# Altium PCB PCB1.PcbDoc
Units mm, origin at the board's own origin, x right, y up, seen from the top; angles counter-clockwise.
Board outline 37.33 x 58.67 mm, 2 copper layers (Top Layer, Bottom Layer); 14 components, 10 nets, 41 pads, 2 vias.
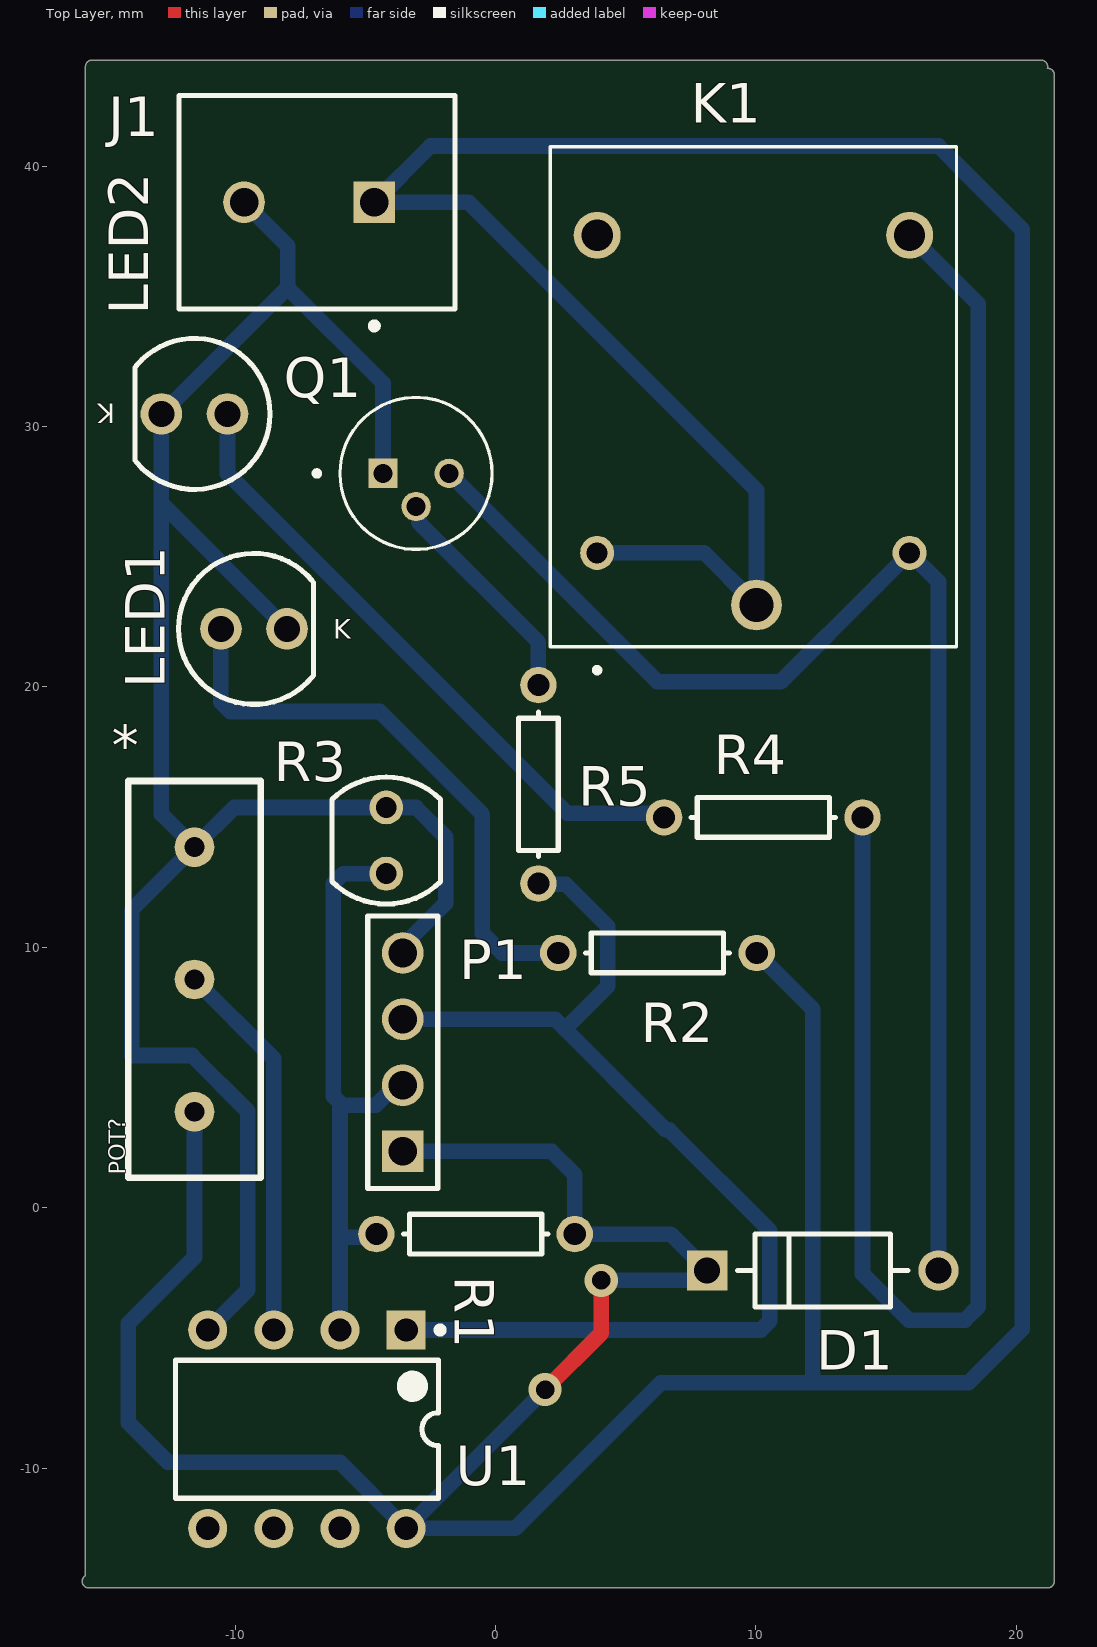
[diagram p0: Top Layer view]
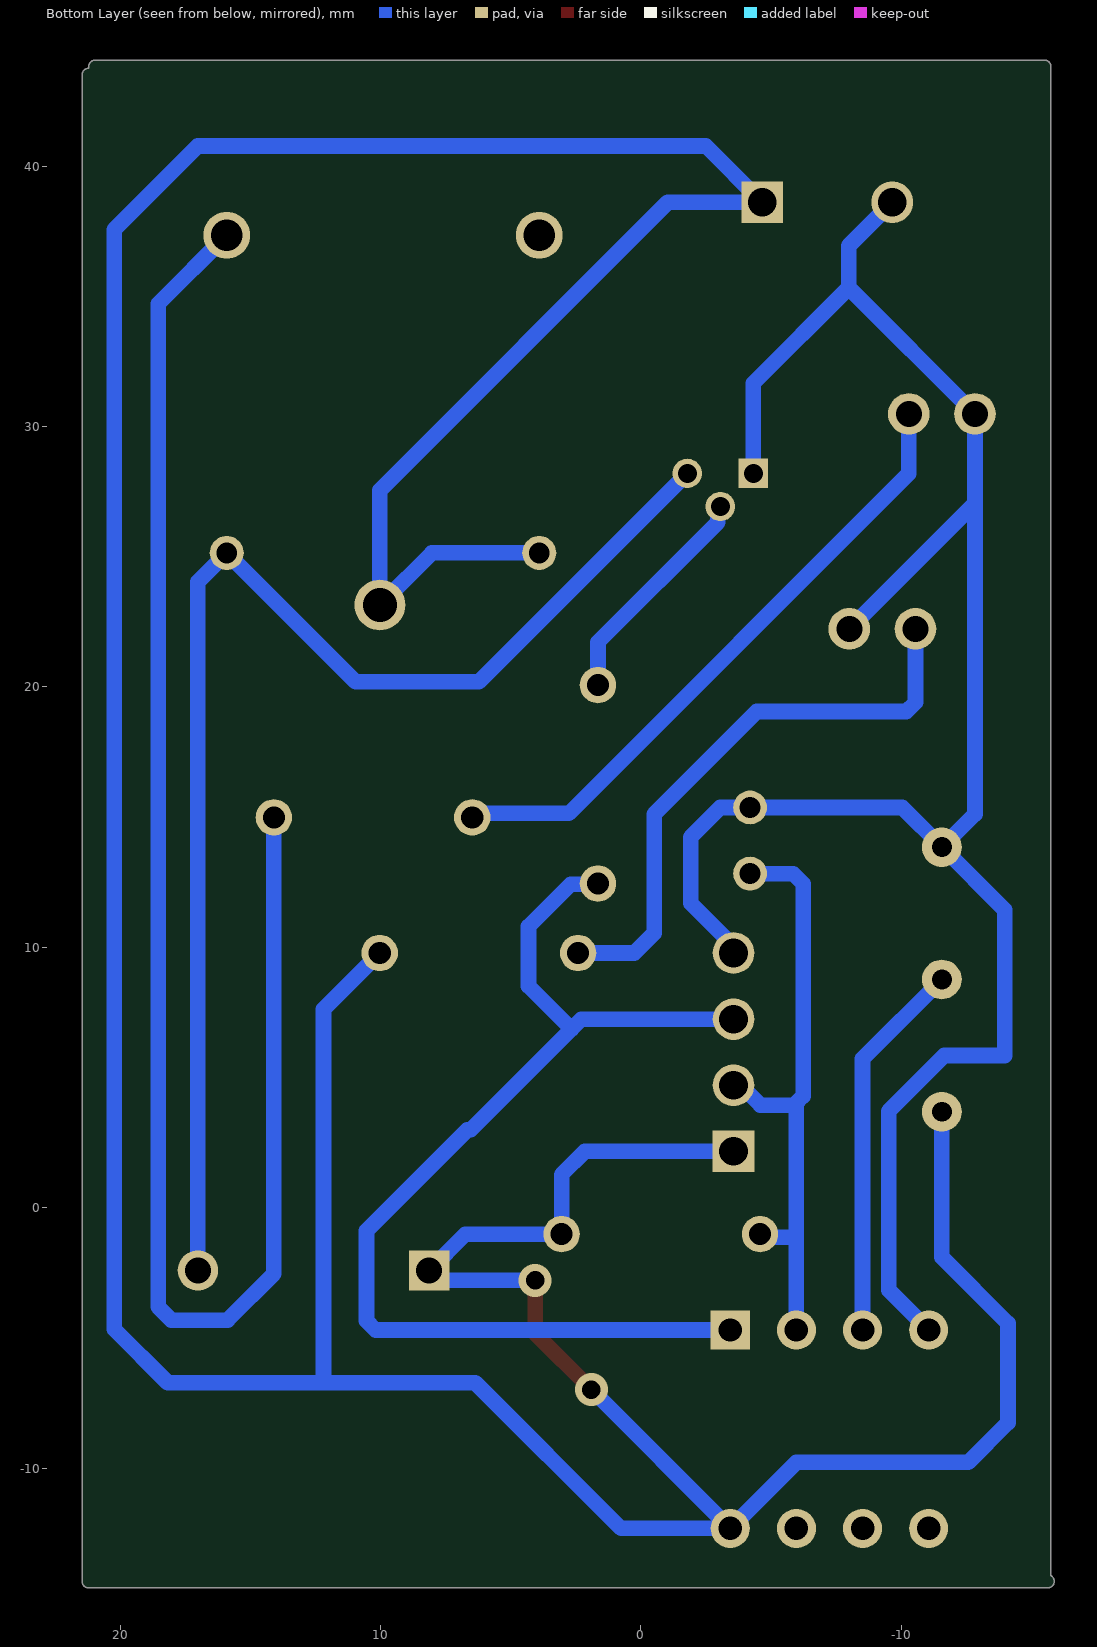
[diagram p1: Bottom Layer view, seen from below]
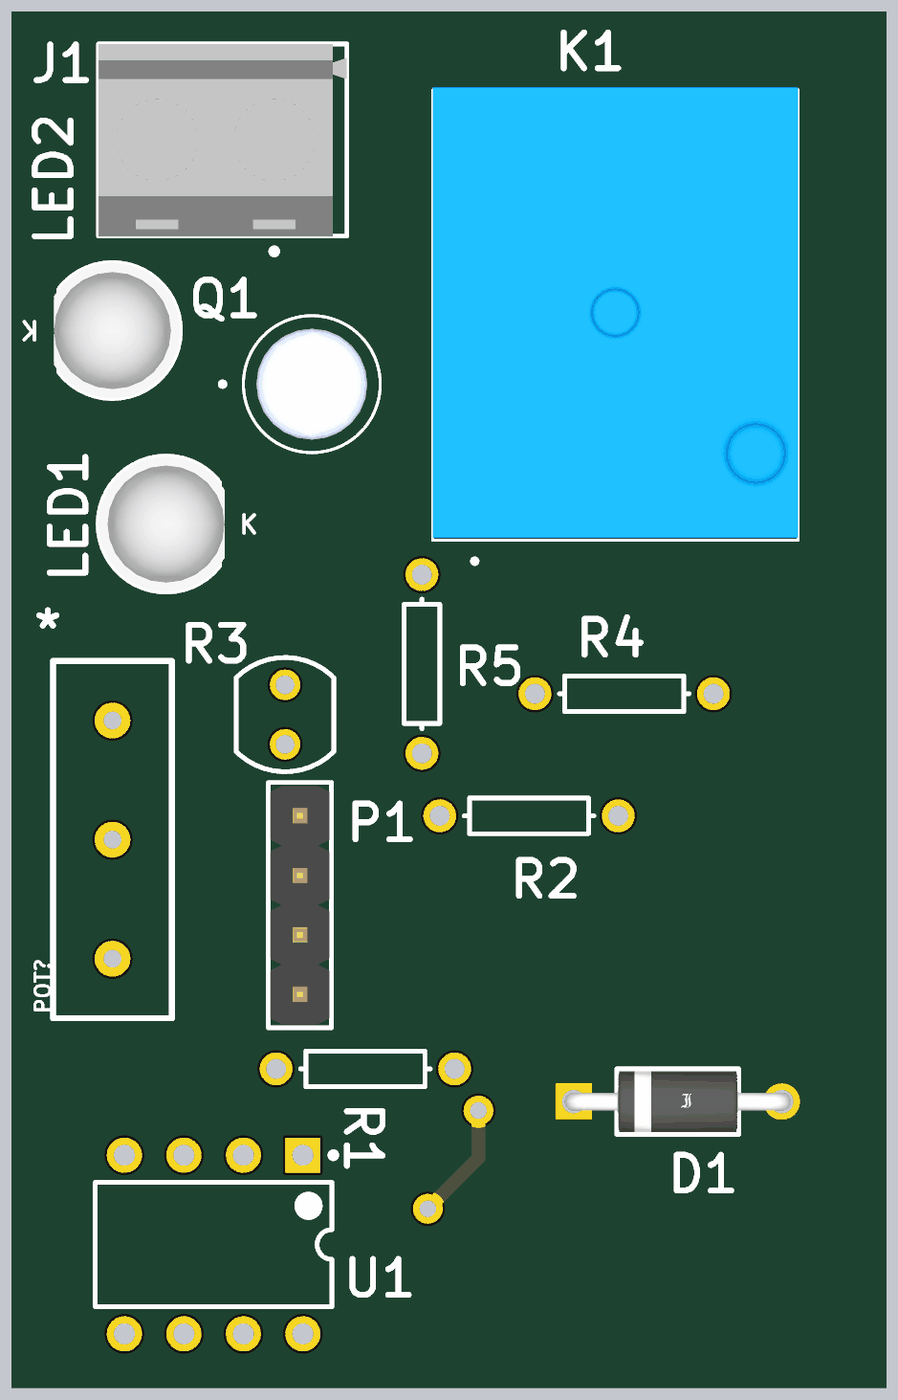
[diagram p2: 3D render of the assembled board from above, using the file's embedded part models]

## Layer stack, top to bottom
Top Solder: solder mask 0.0102, Solder Resist, Dk 3.5
Top Layer: signal copper 0.0356
Dielectric 1: dielectric 0.32, FR-4, Dk 4.8
Bottom Layer: signal copper 0.0356
Bottom Solder: solder mask 0.0102, Solder Resist, Dk 3.5

## Board outline
-15.621,-14.601 cw(c-15.621,-14.351) -15.742,-14.132 cw(c-15.494,-14.097) -15.744,-14.097 -15.744,43.815 cw(c-15.494,43.815) -15.494,44.065 20.955,44.065 cw(c20.955,43.815) 21.205,43.815 cw(c20.955,43.815) 21.198,43.753 cw(c21.209,43.503) 21.459,43.503 21.459,-14.351 cw(c21.209,-14.351) 21.209,-14.601

## Design rules (kind name [scope] priority, off if disabled: settings)
Clearance [All] p1: gap=0.4 ignorepadtopadclearanceinfootprint=FALSE
PolygonConnect [All] p1: connectstyle=Relief reliefconductorwidth=0.254 reliefentries=4 polygonreliefangle="90 Angle" airgapwidth=0.254
RoutingVias [All] p1: holewidth=0.711 width=1.27 viastyle="Through Hole" minholewidth=0.711 minwidth=1.27 maxholewidth=0.711 maxwidth=1.27
SolderMaskExpansion [All] p1: expansion=0.102 istentingtop=FALSE
Width [All] p1: maxlimit=1 minlimit=0.3 preferedwidth=0.6 minimp=50.000000 maximp=50.000000 favimp=50.000000
30 further rules are at their usual default settings.

## Components (designator, comment, footprint, x,y, rotation, side; value= is the part's Value field where it differs from the comment)
* "Component_1" PCBComponent_1 -11.557,3.683 r90 top
D1 "1N4007" FP-1N4007-MFG 12.573,-2.413 r0 top value=15pF
J1 "282836-2" TECO-282836-2_V -7.152,38.608 r180 top
K1 "SRD-12VDC-SL-C" RELAY_SRD-12VDC-SL-C 9.906,31.242 r90 top
LED1 "151051VS04000" "Type 5mm" -9.271,22.225 r0 top
LED2 "151051VS04000" "Type 5mm" -11.557,30.48 r180 top
P1 "61300411121" 61300411121 -3.556,5.969 r90 top
Q1 "2N2222A" TO127P584H533-3 -3.048,28.194 r0 top
R1 "Res1" AXIAL-0.3 -0.762,-1.016 r0 top value=10K
R2 "Res1" AXIAL-0.3 6.223,9.779 r0 top value=1K
R3 "VT90N1" EXCE-VT90N1 -4.191,14.097 r90 top
R4 "Res1" AXIAL-0.3 10.287,14.986 r0 top value=1K
R5 "Res1" AXIAL-0.3 1.651,16.256 r90 top value=3K
U1 "LM358N" ONSC-PDIP-8-626-05_M -7.239,-8.509 r270 top

## Footprints (in the part's own frame and the unit in brackets; to place one, negate y for a bottom-side part, rotate by r counter-clockwise, add the part's x,y. Pads: shape width x height; smd on the part's side, far side on the other; paste and mask are expansions set on the pad)
61300411121 [mm] "Pin Header, pitch 2.54 mm, THT, Vertical, single row, 4p"
  rect 1.6x1.6 hole 1.1: 1(-3.81,0)
  round 1.6 hole 1.1: 2(-1.27,0) 3(1.27,0) 4(3.81,0)
  silkscreen extent -5.23,-1.35 5.23,1.35, body extent -5.08,-1.27 5.08,1.27, height 8.57
AXIAL-0.3 [mm] "Axial Device, Thru-Hole; 2 Leads; 0.3 in Pin Spacing"
  round 1.4 hole 0.85: 1(-3.81,0) 2(3.81,0)
  silkscreen extent -2.77,-0.76 2.77,0.76
EXCE-VT90N1 [mm] "THD, 2-Leads, Body Width 4.17mm (Max), Height 2.29mm"
  round 1.3 hole 0.8: 1(-1.27,0) 2(1.27,0)
  silkscreen extent -2.44,-2.08 2.44,2.08, body extent -2.44,-2.09 2.44,2.09, height 2.29
FP-1N4007-MFG [mm]
  rect 1.55x1.55 hole 1 paste-1000 mask+0: 1(-4.44,0)
  round 1.55 hole 1 paste-1000 mask+0: 2(4.44,0)
  silkscreen extent -3.26,-1.4 3.26,1.4, body extent -5.32,-1.5 5.32,1.5, height 0.25
ONSC-PDIP-8-626-05_M [mm] "DIP, 8-Leads, Body 10x7.1mm, Pitch 2.54mm"
  rect 1.5x1.5 hole 0.9: 1(-3.81,3.81)
  round 1.5 hole 0.9: 2(-3.81,1.27) 3(-3.81,-1.27) 4(-3.81,-3.81) 5(3.81,-3.81) 6(3.81,-1.27) 7(3.81,1.27) 8(3.81,3.81)
  silkscreen extent -3.93,-5.05 2.65,5.24, body extent -3.95,-5 3.95,5, height 5.33
PCBComponent_1 [mil]
  round 60 hole 30: 1(0,0) 2(200,0) 3(400,0)
  silkscreen extent -100,-100 500,100
RELAY_SRD-12VDC-SL-C [mm]
  round 1.308 hole 0.8: COIL1(-6.1,6) COIL2(-6.1,-6)
  round 1.95 hole 1.3: COM(-8.1,-0.12)
  round 1.8 hole 1.2: NC(6.1,6) NO(6.1,-6)
  silkscreen extent -10.7,-7.8 9.5,7.8, body extent -9.6,-7.8 9.6,7.8, height 15.8
TECO-282836-2_V [mm] "Female Header, Pitch 5mm, 1 x 2 Position, Height 10mm"
  rect 1.6x1.6 hole 1.1: 1(-2.5,0)
  round 1.6 hole 1.1: 2(2.5,0)
  silkscreen extent -5.6,-4.1 5,4.87, body extent -5.6,-4.1 5,4.1, height 10
TO127P584H533-3 [mm]
  rect 1.13x1.13 hole 0.73: 1(-1.27,0)
  round 1.13 hole 0.73: 2(0,-1.27) 3(1.27,0)
  silkscreen extent -3.91,-2.92 2.92,2.92, body extent -2.79,-2.79 3.02,3.02, height 2.85
"Type 5mm" [mm] "THT, LED-5mm, 2pin- Body 5.8mm"
  round 1.6 hole 1: 1(1.27,0) 2(-1.27,0)
  silkscreen extent -2.9,-2.9 2.29,2.9, body extent -2.9,-2.9 2.5,2.9, height 11.7

## Part data
D1: library part CMP-123542-000001-1, "Rectifier diode 1000 V 1 A DO-41, ,", Capacitance=15pF, Forward Current=1A, Manufacturer=Diotec, Max Junction Temp=+175°C, Max Repetitive Reverse Voltage=1000V, Max Surge Forward Current=27A, Peak Reverse Current=5uA, Temperature="-50°C to +175°C", Temperature Range Low=-50°C, Automotive=No, Category=Diode, ComponentLink2Description=Datasheet, ComponentLink2URL=https://datasheet.octopart.com/1N4007-Diotec-datasheet-62346875.pdf, Device Class L1="Discrete Semiconductors", Device Class L2=Diodes, Device Class L3="Rectifier Diodes", Height=2.8mm, Ipc Land Pattern Name=DIOAD888W100L520D280, Lead Free=Yes, Manufacturer Part Number=1N4007, Octopart=https://octopart.com/1n4007-diotec-4040411, Package=1N4007, Reverse Voltage=1000V, RoHS=TRUE, Temperature Range High=+175°C
J1: library part CMP-1684-00017-1, "Female Header, Pitch 5 mm, 1 x 2 Position, Height 10 mm, Tail Length 3.5 mm, Rohs, Bulk", Color=Green, Current=13.5A, Manufacturer="TE Connectivity", Package Description="Female Header, Pitch 5 mm, 1 x 2 Position, Height 10 mm, Tail Length 3.5 mm", Package Reference=THD, Standard Package=300, Voltage=300V, 3D Model=282836-2.pdf, Category=Connectors,Interconnects, Clamp Material - Plating=Brass-NickelPlated, Contact Material - Plating=Brass-TinPlated, Datasheet URL=http://www.te.com.cn/commerce/DocumentDelivery/DDEController?Action=showdoc&DocId=Catalog+Section%7F1308389_EUROSTYLE_TERMINAL_BLOCKS%7F0607%7Fpdf%7FEnglish%7FENG_CS_1308389_EUROSTYLE_TERMINAL_BLOCKS_0607.pdf%7F282836-2, Dynamic Catalog=BuchananSeries, Family=TerminalBlocks-WiretoBoard, Featured Product=EurostyleTerminalBlockConnectors, Features=Interlocking(Side), Housing Material=Polyamide(PA66),Nylon6/6, Manufacturer URL=http://www.te.com, Mating Orientation=HorizontalwithBoard, Mounting Type=ThroughHole, Number of Levels=1, Other Names="5ULV-02B / A98076", Packaging=Bulk, Pitch="0.197\"(5.00mm)", Positions Per Level=2, Product Training Modules=Wire-to-BoardEurostyleTerminalBlocks, RoHS Information=282836-2StatementofCompliance, Screw Material - Plating=Brass-NickelPlated, Screw Thread=M3, Series=Buchanan, Torque - Screw=0.68Nm(6Lb-In), Wire Gauge=16-30AWG, Wire Termination=Screw-RisingCageClamp
K1: "General Purpose Non Latching 12VDC SPDT Through Hole Relays RoHS", Package=None, Availability=Unavailable, MF="{'manufacturer': u'Songle Relay'}", MP=SRD-12VDC-SL-C, Price=None
LED1 LED2: library part CMP-1488-00007-1, "THT LED round mono-color color lens, WL-TMRW, Bright Green", Emitting color="Bright Green", Manufacturer="Wuerth Elektronik", ComponentLink1Description="Manufacturer URL", ComponentLink1URL=http://www.we-online.com, ComponentLink2Description=Datasheet, ComponentLink2URL=http://katalog.we-online.de/pbs/datasheet/7448042001.pdfhttp://katalog.we-online.de/pbs/datasheet/7448042001.pdfhttp://katalog.we-online.de/pbs/datasheet/7448042001.pdfhttp://katalog.we-online.de/pbs/datasheet/151051VS04000.pdf, PackageReference="Type 5mm", PartNumber=151051VS04000
P1: library part CMP-1502-01064-1, "THT Vertical Pin Header WR-PHD, Pitch 2.54 mm, Single Row, 4 pins", Contact Resistance=20mOhm, Manufacturer="Wurth Elektronik", Operating Temperature=-40to105degC, Rated Current=3A, Withstanding Voltage=500VAC, Working Voltage=250VAC, Datasheet URL=https://katalog.we-online.de/em/datasheet/6130xx11121.pdf, Gender=Male, Manufacturer URL=http://www.we-online.de, Mounting Technology=THT, Orientation=Vertical, Package Reference=61300411121, Packaging=Bag, Part Number=61300411121, Pin Number=4, Pitch=2.54mm, Publisher=WurthElektronik, Row Number=Single
Q1: "2N2222A 50 V 800 mA NPN Silicon Switching Transistor - TO-18 (TO-206AA)", Package=None, Availability=Unavailable, MF="{'manufacturer': u'Diotec Semiconductor'}", MP=2N2222A, Price=None
R1 R2 R4 R5: "Resistor", LatestRevisionDate=17-Jul-2002, LatestRevisionNote="Re-released for DXP Platform.", PackageDescription="Axial Device, Thru-Hole; 2 Leads; 0.3 in Pin Spacing", PackageReference=AXIAL-0.3, Published=8-Jun-2000, Publisher="Altium Limited"
R3: library part CMP-2000-07406-1, "Photoconductive Resistor, 200 kOhm, 100 V, 80 mW, -40 to 75 degC, 2-Pin THD, RoHS", Dark Resistance=200kohm, Manufacturer="Excelitas Technology", Operating Temperature Max=75°C, Operating Temperature Min=-40°C, Package Description="2-Pin Through Hole Device, Body Width 4.17 mm (Max), Height 2.29 mm", Power Rating=80mW, Resistance @ Lux=12kohm, Resistor Case Style=-, Voltage Rating=100V, Datasheet URL=http://datasheet.octopart.com/VT90N1-Excelitas-datasheet-10388451.pdf, Datasheet Version=09/2006, Manufacturer URL=http://www.excelitas.com/Pages/Index.aspx, Mounting Technology=ThroughHole, Package Reference=VT90N1, Packaging=Each, Product Range=-, SVHC=Cadmiumchloride(15-Jun-2015)
U1: library part CMP-1310-00098-1, "Single Supply Dual Operational Amplifier, 3 to 32 V, 0 to 70 degC, 8-Pin PDIP, Tube", Manufacturer="On Semiconductor", ComponentLink1Description="Manufacturer URL", ComponentLink1URL=http://www.onsemi.com/, ComponentLink2Description=Datasheet, ComponentLink2URL=http://www.onsemi.cn/pub_link/Collateral/LM358-D.PDF, ComponentLink3Description="Package Specification", ComponentLink3URL=http://www.onsemi.com/pub_link/Collateral/LM211-D.PDF, DatasheetVersion="Rev. 27", Mounting Technology="Through Hole", PackageDescription="8-Pin Plastic Dual-In Line Package, Body 9.52 x 6.605 mm, Pitch 2.54 mm", PackageReference=PDIP-8-626-05, PackageVersion="Rev. M, 04/2010", Packing=Tube, PartNumber=LM358N, RoHS=FALSE, VCC Max (V)=32, VCC Min (V)=3

## Via types
v1: diameter 1.27, hole 0.711, Top Layer to Bottom Layer, 2 vias

## Nets (pads, with @x,y where several pads share a name; then routed paths per layer and width w, separated by ;. In a path a pad name is that pad's centre, name@x,y a point inside that pad or via, vN(x,y) a via of type N, cw(c..) or ccw(c..) an arc to the next point about the centre after c; other vN are vias at no path point)
1: *.1 D1.1 J1.1 K1.COIL1 K1.COM P1.1 R1.2 R2.2 U1.8 | length 201.1
  Top Layer w0.6: v1(1.905,-6.985) 4.064,-4.826 v1(4.064,-2.794)
  Bottom Layer w0.6: *.1 -11.557,-1.905 -14.097,-4.445 -14.097,-8.255 -12.573,-9.779 -5.969,-9.779 U1.8 ; P1.1 2.157,2.159 3.048,1.268 R1.2 6.736,-1.016 D1.1 7.752,-2.794 v1(4.064,-2.794) ; v1(1.905,-6.985) U1.8 ; K1.COIL1 8.026,25.142 K1.COM@9.882,23.286 ; K1.COM 10.026,27.552 -1.03,38.608 J1.1 -2.493,40.767 17.018,40.767 18.161,39.624 20.231,37.554 20.231,-4.661 18.171,-6.721 12.192,-6.721 ; R2.2 12.192,7.62 12.192,-6.721 ; U1.8 0.762,-12.319 6.36,-6.721 12.192,-6.721
2: *.2 U1.3 | length 14.7
  Bottom Layer w0.6: *.2 -8.509,5.715 U1.3
3: *.3 J1.2 LED1.1 LED2.1 P1.4 Q1.1 R3.2 U1.4 | length 82.7
  Bottom Layer w0.6: U1.4 -9.525,-3.175 -9.509,-3.175 -9.509,3.703 -11.648,5.842 -13.97,5.842 -13.97,11.43 *.3 ; J1.2 -7.981,36.937 -7.981,35.326 ; LED1.1 -12.827,27.051 ; Q1.1 -4.318,31.663 -7.981,35.326 ; P1.4 -3.556,10.05 -1.905,11.701 -1.905,14.224 -3.048,15.367 -10.033,15.367 *.3 ; -12.827,27.051 -12.827,15.113 *.3 ; -12.827,27.051 LED2.1 -7.981,35.326
NetD1_2: D1.2 K1.COIL2 Q1.3 | length 51.7
  Bottom Layer w0.6: Q1.3@-1.879,28.295 6.223,20.193 10.957,20.193 14.674,23.91 K1.COIL2 ; D1.2 17.013,24.035 K1.COIL2 ; K1.COIL2 15.906,25.394 K1.COIL2
NetK1_NO: K1.NO R4.2 | length 65.2
  Bottom Layer w0.6: R4.2 14.097,-2.54 15.875,-4.318 18.034,-4.318 18.542,-3.81 18.542,34.706 K1.NO
NetLED1_2: LED1.2 R2.1 | length 22.4
  Bottom Layer w0.6: LED1.2 -10.541,19.401 -10.19,19.05 -4.445,19.05 -0.508,15.113 -0.508,10.541 0.254,9.779 R2.1
NetLED2_2: LED2.2 R4.1 | length 24.5
  Bottom Layer w0.6: LED2.2 -10.287,28.194 2.768,15.139 6.324,15.139 R4.1
NetQ1_2: Q1.2 R5.2 | length 8.8
  Bottom Layer w0.6: Q1.2 -2.947,26.823 -2.947,26.315 1.651,21.717 R5.2
OUTA: P1.2 R1.1 R3.1 U1.2 | length 23.7
  Bottom Layer w0.6: U1.2 -5.969,-2.794 -5.969,-1.143 ; R1.1 -4.699,-1.143 -5.969,-1.143 ; R3.1 -5.842,12.827 -6.227,12.442 -6.227,4.288 -5.969,4.03 ; P1.2 -3.827,4.699 -4.589,3.937 -5.876,3.937 -5.969,4.03 ; -5.969,-1.143 -5.969,4.03
OUTB: P1.3 R5.1 U1.1 | length 43
  Bottom Layer w0.6: P1.3 2.286,7.239 6.541,2.984 6.667,2.984 10.541,-0.889 10.541,-4.348 10.19,-4.699 U1.1 ; R5.1 1.674,12.423 2.69,12.423 4.318,10.795 4.318,8.509 2.667,6.858
pads on no net: K1.NC U1.5 U1.6 U1.7

## Silkscreen, mask and mechanical layers (free items; w line width, h text height)
Board:
  lines w0.5: -15.621,-14.351 21.209,-14.351 21.209,43.503 ; -15.494,-14.097 -15.494,43.815 20.955,43.815

## Text inside footprints (layer, text, board x,y; h text height)
*: Top Overlay "POT?" at -14.224,1.27 h0.64 r90
LED1: Top Overlay "K" at -6.223,21.844 h0.76; Mechanical 15 "K" at -6.223,21.844 h0.76
LED2: Top Overlay "K" at -14.605,30.861 h0.76 r180; Mechanical 15 "K" at -14.605,30.48 h0.76 r180